# Altium PCB Load.PcbDoc
Units mm, origin at the board's own origin, x right, y up, seen from the top; angles counter-clockwise.
Board outline 120 x 48 mm, 2 copper layers (Top Layer, Bottom Layer), stack 1.67 mm thick; 32 components, 12 nets, 96 pads, 0 vias.
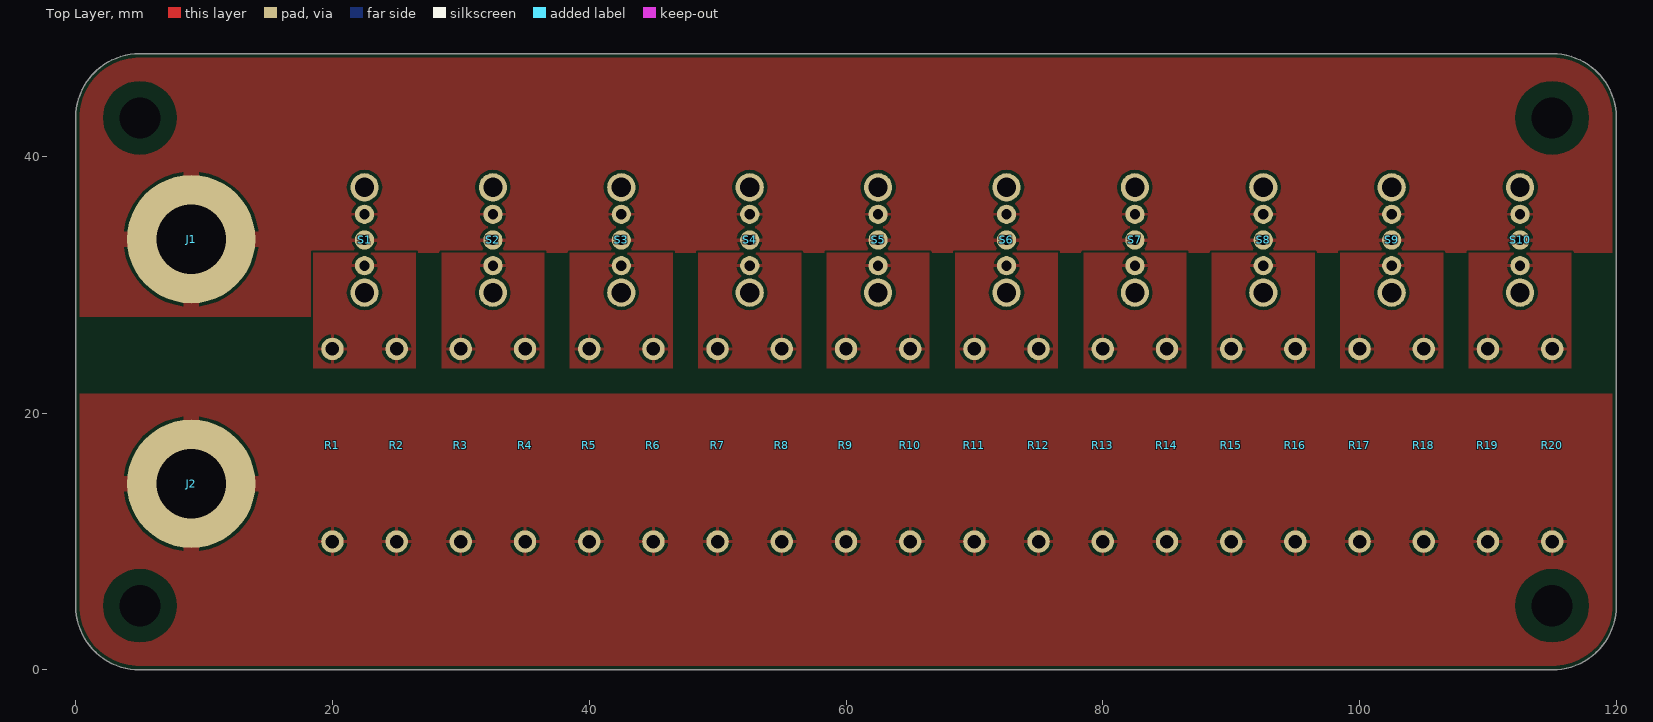
[diagram p0: Top Layer view]
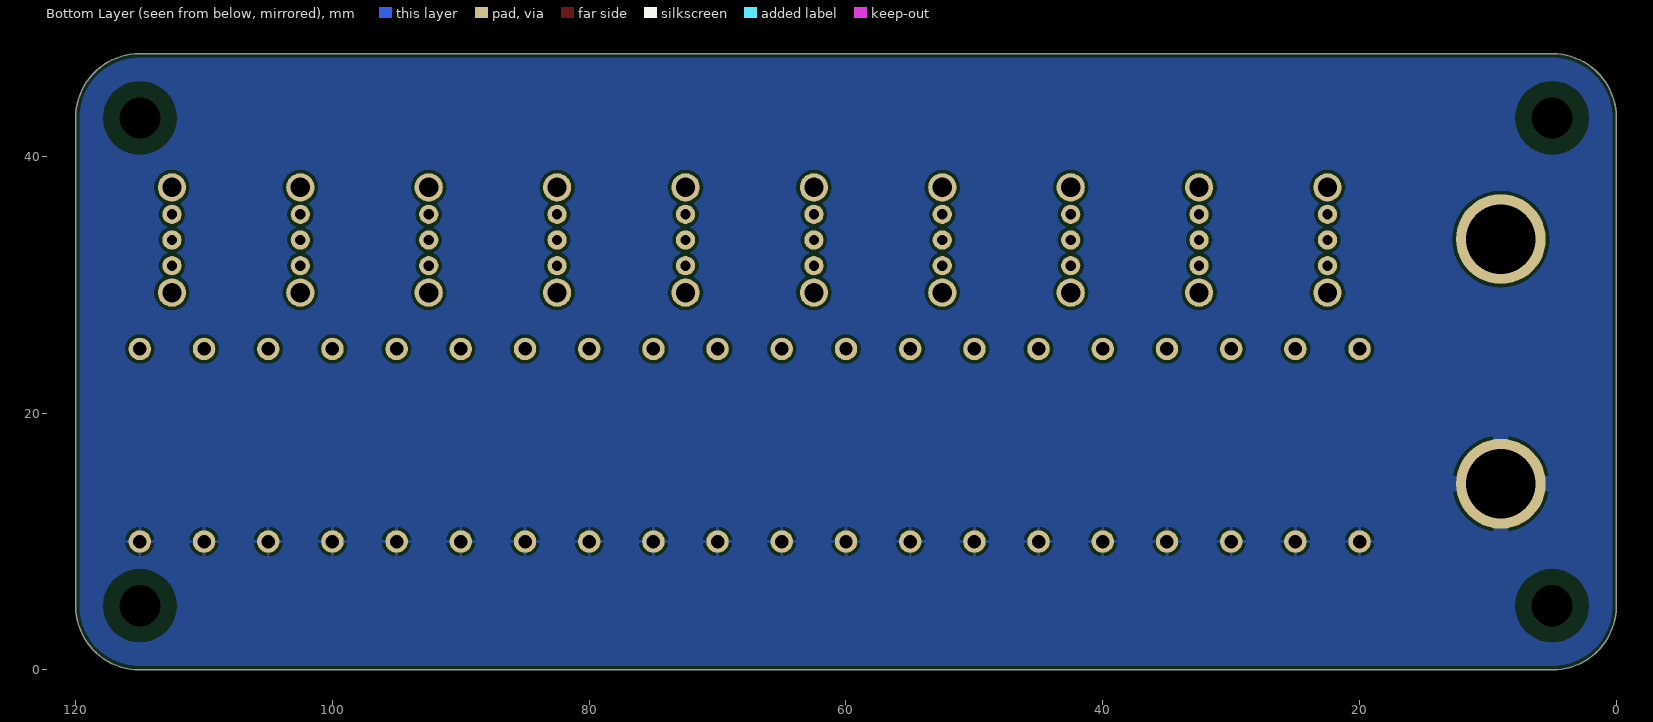
[diagram p1: Bottom Layer view, seen from below]
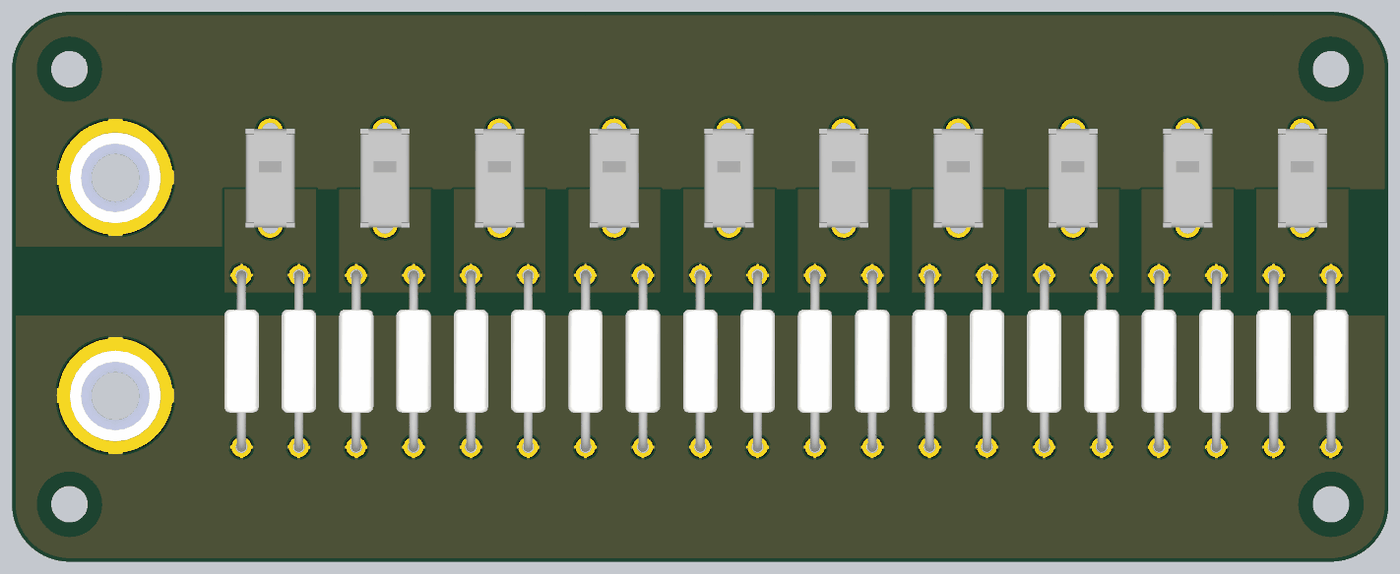
[diagram p2: 3D render of the assembled board from above, using the file's embedded part models]

## Layer stack, top to bottom
Top Solder: solder mask 0.0102, Solder Resist, Dk 3.5
Top Layer: signal copper 0.035
Dielectric 1: dielectric 1.6, FR-4, Dk 4.8
Bottom Layer: signal copper 0.035
Bottom Solder: solder mask 0.0102, Solder Resist, Dk 3.5

## Board outline
0,5 0,43 cw(c5,43) 5,48 115,48 cw(c115,43) 120,43 120,5 cw(c115,5) 115,0 5,0 cw(c5,5)

## Design rules (kind name [scope] priority, off if disabled: settings)
BoardOutlineClearance [All] p1: gap=0.3 ignorepadtopadclearanceinfootprint=FALSE
Clearance "Unplated holes" [PadIsPlated = 'False'] p1: gap=0.127 ignorepadtopadclearanceinfootprint=FALSE except(1.25: Fill-Hole Poly-Hole Region-Hole)
Clearance [All] p2: gap=0.127 ignorepadtopadclearanceinfootprint=FALSE except(0.2: Fill-Fill Fill-Poly Fill-Region Poly-Poly Poly-Region Region-Region; 0.254: Arc-Fill Arc-Poly Arc-Region Track-Fill Track-Poly Track-Region SMDPad-Fill SMDPad-Poly SMDPad-Region THPad-Fill THPad-Poly THPad-Region Via-Fill Via-Poly Via-Region)
HoleSize [All] p1: absolutevalues=TRUE maxlimit=6.3 minlimit=0.2 maxpercent=80.000 minpercent=20.000
MinimumAnnularRing [All] p1: minimumring=0.076
PolygonConnect "Power terminals" [HasFootprint('575-8')] p1: connectstyle=Relief reliefconductorwidth=1.27 reliefentries=4 polygonreliefangle="90 Angle" airgapwidth=0.25
PolygonConnect [All] p2: thpad.connectstyle=Relief thpad.reliefconductorwidth=0.254 thpad.reliefentries=4 thpad.polygonreliefangle="90 Angle" thpad.airgapwidth=0.254 smdpad.connectstyle=Direct smdpad.reliefconductorwidth=0.254 smdpad.reliefentries=4 smdpad.polygonreliefangle="90 Angle" smdpad.airgapwidth=0.254 via.connectstyle=Direct via.reliefconductorwidth=0.254 via.reliefentries=4 via.polygonreliefangle="90 Angle" via.airgapwidth=0.254
RoutingVias [All] p1: holewidth=0.711 width=1.27 viastyle="Through Hole" minholewidth=0.711 minwidth=1.27 maxholewidth=0.711 maxwidth=1.27
SolderMaskExpansion [All] p1: expansion=0.102
Width [All] p1: maxlimit=1 minlimit=0.127 preferedwidth=0.25
29 further rules are at their usual default settings.

## Components (designator, comment, footprint, x,y, rotation, side; value= is the part's Value field where it differs from the comment)
J1 "575-8" 575-8 9,33.55 r0 top
J2 "575-8" 575-8 9,14.5 r0 top
R1 "68k" "KOA MOS1" 20,17.5 r90 top
R2 "68k" "KOA MOS1" 25,17.5 r90 top
R3 "68k" "KOA MOS1" 30,17.5 r90 top
R4 "68k" "KOA MOS1" 35,17.5 r90 top
R5 "68k" "KOA MOS1" 40,17.5 r90 top
R6 "68k" "KOA MOS1" 45,17.5 r90 top
R7 "68k" "KOA MOS1" 50,17.5 r90 top
R8 "68k" "KOA MOS1" 55,17.5 r90 top
R9 "68k" "KOA MOS1" 60,17.5 r90 top
R10 "68k" "KOA MOS1" 65,17.5 r90 top
R11 "68k" "KOA MOS1" 70,17.5 r90 top
R12 "68k" "KOA MOS1" 75,17.5 r90 top
R13 "68k" "KOA MOS1" 80,17.5 r90 top
R14 "68k" "KOA MOS1" 85,17.5 r90 top
R15 "68k" "KOA MOS1" 90,17.5 r90 top
R16 "68k" "KOA MOS1" 95,17.5 r90 top
R17 "68k" "KOA MOS1" 100,17.5 r90 top
R18 "68k" "KOA MOS1" 105,17.5 r90 top
R19 "68k" "KOA MOS1" 110,17.5 r90 top
R20 "68k" "KOA MOS1" 115,17.5 r90 top
S1 "OS102011MS2QN1" OS102011MS2QN1 22.5,33.485 r90 top
S2 "OS102011MS2QN1" OS102011MS2QN1 32.5,33.485 r90 top
S3 "OS102011MS2QN1" OS102011MS2QN1 42.5,33.485 r90 top
S4 "OS102011MS2QN1" OS102011MS2QN1 52.5,33.485 r90 top
S5 "OS102011MS2QN1" OS102011MS2QN1 62.5,33.485 r90 top
S6 "OS102011MS2QN1" OS102011MS2QN1 72.5,33.485 r90 top
S7 "OS102011MS2QN1" OS102011MS2QN1 82.5,33.485 r90 top
S8 "OS102011MS2QN1" OS102011MS2QN1 92.5,33.485 r90 top
S9 "OS102011MS2QN1" OS102011MS2QN1 102.5,33.485 r90 top
S10 "OS102011MS2QN1" OS102011MS2QN1 112.5,33.485 r90 top

## Footprints (in the part's own frame and the unit in brackets; to place one, negate y for a bottom-side part, rotate by r counter-clockwise, add the part's x,y. Pads: shape width x height; smd on the part's side, far side on the other; paste and mask are expansions set on the pad)
575-8 [mm] "Keystone 575-8"
  round 10 / inner round 10 / far side round 7 hole 5.41: 1(0,0)
  body extent -3.96,-4 3.96,3.92, height 2.36
"KOA MOS1" [mm] "MOS1 THT resistor 15mm spacing"
  round 1.75 hole 1.05: 1(-7.5,0) 2(7.5,0)
  body extent -7.9,-1.5 7.9,1.5, height 3.5
OS102011MS2QN1 [mm]
  round 1.5 hole 0.8: 1(-2,0) 2(0,0) 3(2,0)
  round 2.2 hole 1.5: ""(-4.1,0) ""(4.1,0)
  body extent -4.3,-2.15 4.3,2.15, height 8.7

## Part data
J1 J2: "Keystone PCB banana jack", Supplier Part Number 1=36-575-8-ND, Supplier 1=Digi-Key, Supplier 2=Mouser, Supplier Part Number 2=534-575-8
R1 R2 R3 R4 R5 R6 R7 R8 R9 R10 R11 R12 R13 R14 R15 R16 R17 R18 R19 R20: library part MOS1CT528R683J, "Metal Oxide Resistors 68K ohm 5% 1W", Case/Package=Metal, Manufacturer="KOA Speer", Manufacturer Part Number=MOS1CT52R183J, Max Operating Temperature=200°C, Min Operating Temperature=-55°C, Package Quantity=4000, Power Rating=1W, Supplier Part Number 1=660-MOS1CT528R683J, Temperature Coefficient=300ppm/°C, Tolerance=5%, Length=9mm, Packaging="Tape and Reel", Pricing 1="1=0.1, 100=0.069, 500=0.058, 1000=0.052, 4000=0.046, 8000=0.04 (USD)", Resistance=68k, Stock 1=1404, Supplier 1=Mouser, Termination=Axial
S1 S2 S3 S4 S5 S6 S7 S8 S9 S10: "SPDT slide switch", Contact Current Rating=100mA, Contact Resistance=20mR, Insulation Resistance=100MR, Manufacturer="ITT C&K", Max Operating Temperature=70°C, Max Voltage Rating (DC)=12V, Min Operating Temperature=-30°C, Package Quantity=300, Supplier Part Number 1=CKN9565-ND, Actuator Length=4mm, Actuator Material=Polyoxymethylene,Acetal,Polyacetal, Actuator Type=Standard, ComponentLink1Description=http://www.farnell.com/datasheets/2674787.pdf?src-supplier=Element14, ComponentLink1URL=http://www.farnell.com/datasheets/2674787.pdf?src-supplier=Element14, ComponentLink2Description=https://www.ckswitches.com/media/1428/os.pdf?src-supplier=Digi-Key, ComponentLink2URL=https://www.ckswitches.com/media/1428/os.pdf?src-supplier=Digi-Key, ComponentLink3Description=http://uk.rs-online.com/webdocs/1263/0900766b81263f61.pdf?src-supplier=RSComponents, ComponentLink3URL=http://uk.rs-online.com/webdocs/1263/0900766b81263f61.pdf?src-supplier=RSComponents, ComponentLink4Description=http://www.farnell.com/datasheets/2674787.pdf?src-supplier=Newark, ComponentLink4URL=http://www.farnell.com/datasheets/2674787.pdf?src-supplier=Newark, ComponentLink5Description=https://www.verical.com/server-webapp/html/getDatasheet?partID=320490&src-supplier=Verical, ComponentLink5URL=https://www.verical.com/server-webapp/html/getDatasheet?partID=320490&src-supplier=Verical, ComponentLink6Description=https://www.alliedelec.com/m/d/08271ccc8b1809c6b911a7d3c93f3e8a.pdf?src-supplier=Allied+Electronics, ComponentLink6URL=https://www.alliedelec.com/m/d/08271ccc8b1809c6b911a7d3c93f3e8a.pdf?src-supplier=Allied+Electronics, ComponentLink7Description=http://www1.futureelectronics.com/doc/C%20&%20K%20COMPONENTS/OS102011MS2QN1.pdf?src-supplier=Future+Electronics, ComponentLink7URL=http://www1.futureelectronics.com/doc/C%20&%20K%20COMPONENTS/OS102011MS2QN1.pdf?src-supplier=Future+Electronics, Contact Material="Copper Alloy,Brass,Silver", Contact Plating=Silver,Gold, Contact Style=Non-Shorting, Current Rating=100mA, Depth=4.3mm, Electrical Life=10000Cycles, Housing Material=Resin, Lead Free="Lead Free", Length=8.6mm, Manufacturer Part Number=OS102011MS2QN1, Max Current Rating=100mA, Mechanical Life=10000Cycles, Mount="Through Hole,PCB", Orientation=Vertical, Packaging=Bulk, Pricing 1="1=0.46, 10=0.438, 25=0.4292, 50=0.3836, 100=0.3654, 250=0.35628, 500=0.30146, 1000=0.29232, 5000=0.25578 (USD)", Pricing 2="1=0.39, 25=0.38, 50=0.344, 100=0.321, 250=0.29, 500=0.274 (USD)", Radiation Hardening=No, REACH SVHC="No SVHC", Stock 1=24998, Stock 2=8188, Supplier 1=Digi-Key, Supplier 2=Mouser, Supplier Part Number 2=611-OS102011MS2QN1, Switch Function=On-On, Switch Travel=2mm, Termination="PC Pins", Throw Configuration=SPDT, Voltage Rating (DC)=12V

## Free pads (board coordinates)
  round 0 hole 3.2 unplated: ""(5,5) ""(5,43) ""(115,5) ""(115,43)

## Nets (pads, with @x,y where several pads share a name; then routed paths per layer and width w, separated by ;. In a path a pad name is that pad's centre, name@x,y a point inside that pad or via, vN(x,y) a via of type N, cw(c..) or ccw(c..) an arc to the next point about the centre after c; other vN are vias at no path point)
GND: J2.1 R1.1 R2.1 R3.1 R4.1 R5.1 R6.1 R7.1 R8.1 R9.1 R10.1 R11.1 R12.1 R13.1 R14.1 R15.1 R16.1 R17.1 R18.1 R19.1 R20.1
NetJ1_1: J1.1 S1.2 S1.3 S2.2 S2.3 S3.2 S3.3 S4.2 S4.3 S5.2 S5.3 S6.2 S6.3 S7.2 S7.3 S8.2 S8.3 S9.2 S9.3 S10.2 S10.3
NetR1_2: R1.2 R2.2 S1.1
NetR3_2: R3.2 R4.2 S2.1
NetR5_2: R5.2 R6.2 S3.1
NetR7_2: R7.2 R8.2 S4.1
NetR9_2: R9.2 R10.2 S5.1
NetR11_2: R11.2 R12.2 S6.1
NetR13_2: R13.2 R14.2 S7.1
NetR15_2: R15.2 R16.2 S8.1
NetR17_2: R17.2 R18.2 S9.1
NetR19_2: R19.2 R20.2 S10.1
pads on no net: S1. S2. S3. S4. S5. S6. S7. S8. S9. S10.

## Polygon pours and split planes (outlines as drawn)
GND on Top Layer (solid, pour order 22): 0,0 0,21.5 120,21.5 120,0
NetJ1_1 on Top Layer (solid, pour order 20): 0,27.5 18.5,27.5 18.5,32.5 120,32.5 120,48 0,48
NetR19_2 on Top Layer (solid, pour order 18): 108.5,32.5 108.5,23.5 116.5,23.5 116.5,32.5
NetR17_2 on Top Layer (solid, pour order 16): 98.5,32.5 98.5,23.5 106.5,23.5 106.5,32.5
NetR15_2 on Top Layer (solid, pour order 14): 88.5,32.5 88.5,23.5 96.5,23.5 96.5,32.5
NetR13_2 on Top Layer (solid, pour order 12): 78.5,32.5 86.5,32.5 86.5,23.5 78.5,23.5
NetR11_2 on Top Layer (solid, pour order 10): 68.5,32.5 68.5,23.5 76.5,23.5 76.5,32.5
NetR9_2 on Top Layer (solid, pour order 8): 58.5,32.5 66.5,32.5 66.5,23.5 58.5,23.5
NetR7_2 on Top Layer (solid, pour order 6): 48.5,32.5 48.5,23.5 56.5,23.5 56.5,32.5
NetR5_2 on Top Layer (solid, pour order 4): 38.5,32.5 38.5,23.5 46.5,23.5 46.5,32.5
NetR3_2 on Top Layer (solid, pour order 2): 28.5,32.5 28.5,23.5 36.5,23.5 36.5,32.5
NetR1_2 on Top Layer (solid, pour order 0): 18.5,32.5 18.5,23.5 26.5,23.5 26.5,32.5
GND on Bottom Layer (solid, pour order 24): 0,0 120,0 120,48 0,48

## Silkscreen, mask and mechanical layers (free items; w line width, h text height)
Outline:
  the board outline again, w0.2